# EAGLE board 4x1button_msp430 v10 (EAGLE 9.7.0)
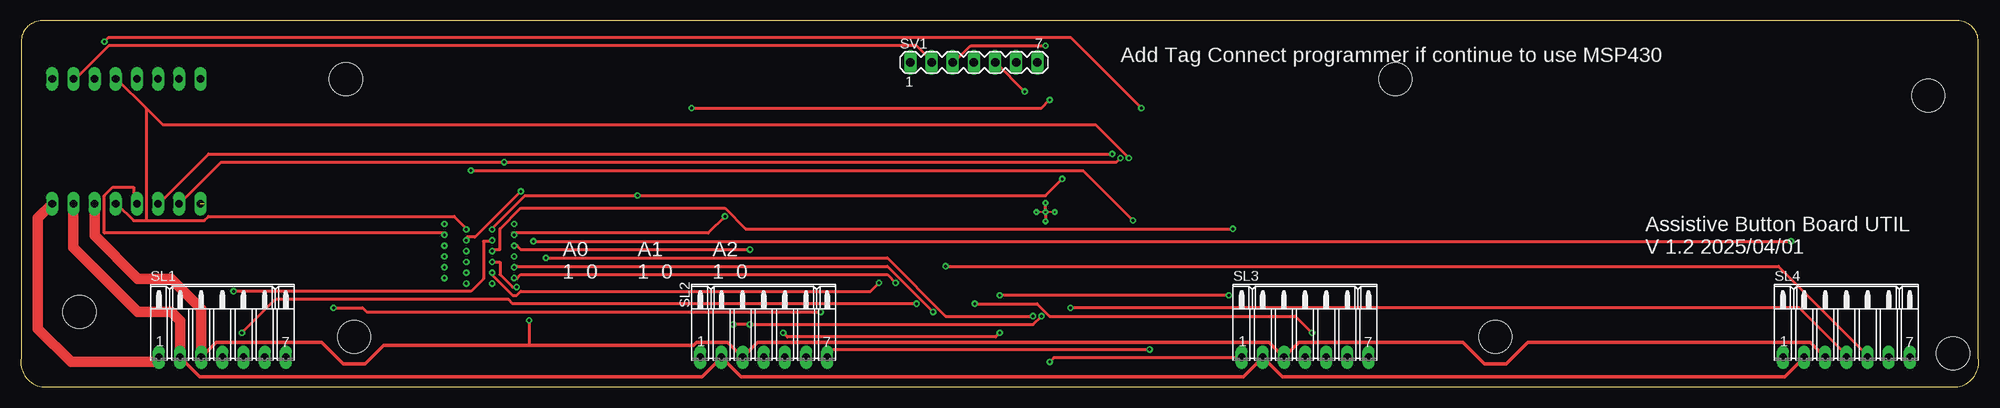
[diagram p0: board, top side]
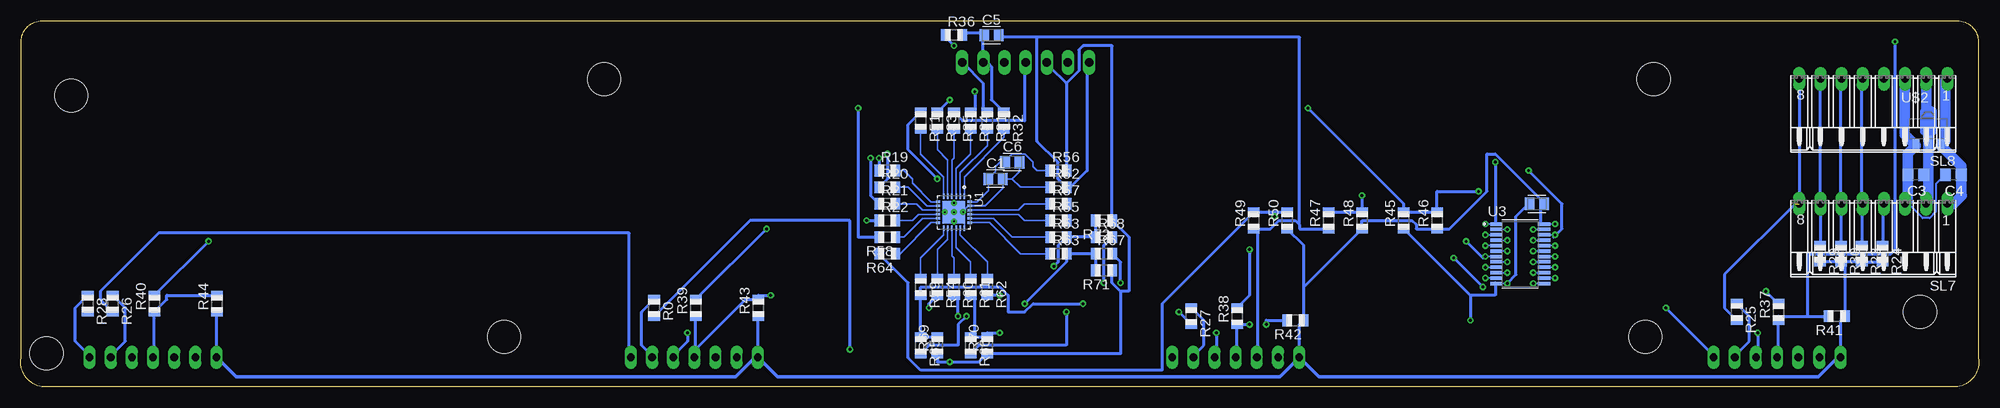
[diagram p1: board, bottom side, seen from below]

Size 235.08 x 44 mm. Coordinates in mm from the lower left corner, seen from the top.
Outline: 232.54,44 2.54,44 arc90 0.04,41.5 0.04,3.5 arc90 2.54,0 232.54,0 arc90 235.04,3.5 235.04,41.5 arc90 232.54,44
Copper layers (1*16): Top 0.035mm / dielectric 1.5mm / Bottom 0.035mm
Design rules "Fusion Electronics Design Rules": minimum track width 6mil, minimum drill 0.35mm, track to track 6mil, track to pad 6mil, pad to pad 6mil, via to via 6mil, smd to smd 6mil, copper to edge 40mil, drill to drill 6mil, minimum pad ring 10mil, minimum via ring 8mil, stop-mask expansion 4mil, vias tented up to drill 0mil, thermal gap 10mil
Holes 4 mm at 39.04,36.98 232,4.05 7.04,9 40.04,6 177.04,6 229.04,35 165.04,37

## Footprints (pad centres in the part's own frame; a part is rotated, then mirrored left to right if it is on the bottom)
CAPC2012X110 = smd 1.165 x 1.465: 1 -0.875,0; 2 0.875,0
C0805 = smd 1.3 x 1.5: 1 -0.95,0; 2 0.95,0
R0805 = smd 1.1 x 1.4: 1 -1,0; 2 1,0
07PA = drill 0.914 long: 1 -7.62,0; 2 -5.08,0; 3 -2.54,0; 4 0,0; 5 2.54,0; 6 5.08,0; 7 7.62,0
08PA = drill 0.914 long: 1 -8.89,0; 2 -6.35,0; 3 -3.81,0; 4 -1.27,0; 5 1.27,0; 6 3.81,0; 7 6.35,0; 8 8.89,0
MA07-1 = drill 1.016 long: 1 -7.62,0; 2 -5.08,0; 3 -2.54,0; 4 0,0; 5 2.54,0; 6 5.08,0; 7 7.62,0
QFN50P400X400X100-25N = smd 0.58 x 0.24: 1 -1.913,1.25; 2 -1.913,0.75; 3 -1.913,0.25; 4 -1.913,-0.25; 5 -1.913,-0.75; 6 -1.913,-1.25; 13 1.913,-1.25; 14 1.913,-0.75; 15 1.913,-0.25; 16 1.913,0.25; 17 1.913,0.75; 18 1.913,1.25 | smd 0.24 x 0.58: 7 -1.25,-1.913; 8 -0.75,-1.913; 9 -0.25,-1.913; 10 0.25,-1.913; 11 0.75,-1.913; 12 1.25,-1.913; 19 1.25,1.913; 20 0.75,1.913; 21 0.25,1.913; 22 -0.25,1.913; 23 -0.75,1.913; 24 -1.25,1.913 | smd 2.7 x 2.7: 25 0,0 | drill 0.2 pad 0.3: 26 0,1.1; 27 -1.1,0; 28 0,0; 29 1.1,0; 30 0,-1.1
SOP65P640X110-24N = smd 1.57 x 0.41: 1 -2.87,3.575; 2 -2.87,2.925; 3 -2.87,2.275; 4 -2.87,1.625; 5 -2.87,0.975; 6 -2.87,0.325; 7 -2.87,-0.325; 8 -2.87,-0.975; 9 -2.87,-1.625; 10 -2.87,-2.275; 11 -2.87,-2.925; 12 -2.87,-3.575; 13 2.87,-3.575; 14 2.87,-2.925; 15 2.87,-2.275; 16 2.87,-1.625; 17 2.87,-0.975; 18 2.87,-0.325; 19 2.87,0.325; 20 2.87,0.975; 21 2.87,1.625; 22 2.87,2.275; 23 2.87,2.925; 24 2.87,3.575
HT7750-1 = smd 0.8 x 1.4: GND -1.499,-1.981; VOUT 1.499,-1.981 | smd 0.8 x 1.9: VIN 0,-1.727

## Placement (x,y rotation side)
C1  0.1uf  [CAPC2012X110]  118.04,25 0 bottom
C2  0.1uf  [CAPC2012X110]  53.04,22 180 bottom
C3  0.1uf  [C0805]  7.54,25.5 180 bottom
C4  0.1uf  [C0805]  3.04,25.5 180 bottom
C5  1000pf  [CAPC2012X110]  118.54,42.25 0 bottom
C6  10uf  [CAPC2012X110]  116.04,27 0 bottom
R0  10  [R0805]  159.04,9.5 270 bottom
R19  10  [R0805]  131.04,26 0 bottom
R20  10  [R0805]  131.04,24 0 bottom
R21  10  [R0805]  131.04,22 0 bottom
R22  10  [R0805]  131.04,20 0 bottom
R23  2k  [R0805]  14.04,16 270 bottom
R24  2k  [R0805]  11.54,16 270 bottom
R25  0  [R0805]  29.04,9 270 bottom
R26  0  [R0805]  224.04,10 270 bottom
R27  0  [R0805]  94.54,8.5 270 bottom
R28  0  [R0805]  227.04,10 270 bottom
R29  2k  [R0805]  19.04,16 270 bottom
R30  2k  [R0805]  16.54,16 270 bottom
R31  10  [R0805]  119.04,32 270 bottom
R32  10  [R0805]  117.04,32 270 bottom
R33  DNP_10  [R0805]  125.04,32 270 bottom
R34  10  [R0805]  121.04,32 270 bottom
R35  10  [R0805]  123.04,32 270 bottom
R36  47k  [R0805]  123.04,42.28 0 bottom
R37  10  [R0805]  24.04,9 90 bottom
R38  10  [R0805]  89.04,8.5 90 bottom
R39  10  [R0805]  154.04,9.5 90 bottom
R40  10  [R0805]  219.04,10 90 bottom
R41  1k  [R0805]  17.04,8.5 180 bottom
R42  1k  [R0805]  82.04,8 180 bottom
R43  1k  [R0805]  146.54,9.5 90 bottom
R44  1k  [R0805]  211.54,10 90 bottom
R45  10  [R0805]  69.04,20 90 bottom
R46  DNP_10  [R0805]  65.04,20 90 bottom
R47  10  [R0805]  78.04,20 90 bottom
R48  DNP_10  [R0805]  74.04,20 90 bottom
R49  10  [R0805]  87.04,20 90 bottom
R50  DNP_10  [R0805]  83.04,20 90 bottom
R51  DNP_10  [R0805]  127.04,32 270 bottom
R52  10  [R0805]  110.47,24 0 bottom
R53  10  [R0805]  110.47,18 0 bottom
R54  10  [R0805]  125.04,12 270 bottom
R55  10  [R0805]  110.47,20 0 bottom
R56  10  [R0805]  110.47,26 0 bottom
R57  10  [R0805]  110.47,22 0 bottom
R58  10  [R0805]  131.04,18 180 bottom
R59  10  [R0805]  127.04,12 270 bottom
R60  10  [R0805]  123.04,12 270 bottom
R61  10  [R0805]  121.04,12 270 bottom
R62  10  [R0805]  119.04,12 270 bottom
R63  10  [R0805]  110.47,16 0 bottom
R64  DNP_10  [R0805]  131.04,16 180 bottom
R65  10  [R0805]  127.04,5 270 bottom
R66  10  [R0805]  121.04,5 270 bottom
R67  10  [R0805]  105.04,16 0 bottom
R68  10  [R0805]  105.04,18 0 bottom
R69  1k  [R0805]  125.04,5 90 bottom
R70  1k  [R0805]  119.04,5 90 bottom
R71  1k  [R0805]  105.04,14 180 bottom
R72  1k  [R0805]  105.04,20 180 bottom
SL1  [07PA]  24.2,3.56 0 top
SL2  [07PA]  89.2,3.56 0 top
SL3  [07PA]  154.2,3.56 0 top
SL4  [07PA]  219.2,3.56 0 top
SL7  [08PA]  12.66,22 180 bottom
SL8  [08PA]  12.66,37 180 bottom
SV1  MSP_Programmer  [MA07-1]  114.44,39 0 top
U1  MSP430FR2433IRGER  [QFN50P400X400X100-25N]  123.04,21 270 bottom
U3  PCA9555PW,118  [SOP65P640X110-24N]  55.04,16 0 bottom
U$2  HT7533-1  [HT7750-1]  6.04,31 0 bottom

## Library data of the parts
C1 C2 C5 C6 = Capacitor; CATEGORY: Capacitor; PACKAGE_SIZE: 0805; PACKAGE_TYPE: SMD; SUBCATEGORY: Ceramic Capacitors; TYPE: MLCC
C3 C4 = resistor; HEIGHT: 1
R0 R19-R72 = adafruit
SL1-SL4 SL7 SL8 = con-amp-quick; OC_FARNELL: unknown; OC_NEWARK: unknown
SV1 = con-lstb; OC_FARNELL: unknown; OC_NEWARK: unknown
U1 = MSP430FR2433IRGER; MANUFACTURER: Texas Instruments; MAXIMUM_PACKAGE_HEIGHT: 1.00 mm; PARTREV: 8/2017; STANDARD: Manufacturer Recommendations
U3 = PCA9555PW_118; MANUFACTURER: NXP; MAXIMUM_PACKAGE_HEIGHT: 1.1mm; PARTREV: 10; STANDARD: IPC 7351B
U$2 = SOT89_VoltageRgulator

## Nets
!BCL_RST: C5.1 R32.1 R36.2 SV1.6
!INT: R19.1 R29.1 SL7.7 SL8.7 U3.1
!RESET: R20.1 R30.1 SL7.6 SL8.6
!RST!/NMI/SBWTDIO: R32.2 U1.1
+3V3: C2.1 C4.1 R23.2 R24.2 R29.2 R30.2 R36.1 R41.1 R42.1 R43.1 R44.1 R46.1 R48.1 R50.1 R56.2 R69.1 R70.1 R71.1 R72.1 SL1.1 SL2.1 SL3.1 SL4.1 SL7.1 SL8.1 SV1.3 U3.24 U$2.VOUT
+5: C3.1 SL1.2 SL2.2 SL3.2 SL4.2 SL7.2 SL8.2 SV1.2 U$2.VIN
A0: R33.1 R45.2 R46.2 U3.21
A1: R47.2 R48.2 R51.1 U3.2
A2: R49.2 R50.2 R64.2 U3.3
BCL_RXD: R35.1 SV1.4
BCL_TXD: R34.1 SV1.5
BLC_TEST: R31.1 SV1.7
BUTTON1: R37.1 R41.2 R58.2 SL1.4
BUTTON2: R38.1 R42.2 R60.2 SL2.4
BUTTON3: R39.1 R43.2 R62.2 SL3.4
BUTTON4: R40.1 R44.2 R54.2 SL4.4
D_IN1: R25.1 SL1.6
D_IN2: R27.1 SL2.6
D_IN3: R0.1 SL3.6
D_IN4: R26.1 SL4.6
D_OUT1: R27.2 SL1.7
D_OUT2: R0.2 SL2.7
D_OUT3: R26.2 SL3.7
D_OUT4: R28.1 SL4.7
DVCC: C1.1 C6.1 R56.1 U1.24
DVSS: C1.2 C6.2 R52.1 U1.18 U1.23 U1.25 U1.26 U1.27 U1.28 U1.29 U1.30
FEEDBACK1: R59.2 R65.1 R69.2 SL1.5
FEEDBACK2: R61.2 R66.1 R70.2 SL2.5
FEEDBACK3: R63.2 R67.1 R71.2 SL3.5
FEEDBACK4: R53.2 R68.1 R72.2 SL4.5
GND: C2.2 C3.2 C4.2 C5.2 R45.1 R47.1 R49.1 R52.2 SL1.3 SL2.3 SL3.3 SL4.3 SL7.3 SL8.3 SV1.1 U3.12 U$2.GND
IO0_0: R37.2 U3.4
IO0_1: R38.2 U3.5
IO0_2: R39.2 U3.6
IO0_3: R40.2 U3.7
IO0_4: R65.2 U3.8
IO0_5: R66.2 U3.9
IO0_6: R67.2 U3.10
IO0_7: R68.2 U3.11
IO1_0: U3.13
IO1_1: U3.14
IO1_2: U3.15
IO1_3: U3.16
IO1_4: U3.17
IO1_5: U3.18
IO1_6: U3.19
IO1_7: U3.20
NEO_PIXEL_IN: R25.2 SL7.8 SL8.8
NEO_PIXEL_OUT: R28.2
P1.0/UCB0STE/TA0CLK/A0/VEREF+: R19.2 U1.7
P1.1/UCB0CLK/TA0.1/A1: R20.2 U1.8
P1.2/UCB0SIMO/UCB0SDA/TA0.2/A2/VEREF-: R21.2 U1.9
P1.3/UCB0SOMI/UCB0SCL/MCLK/A3: R22.2 U1.10
P1.4/UCA0TXD/UCA0SIMO/TA1.2/TCK/A4/VREF+: R34.2 U1.3
P1.5/UCA0RXD/UCA0SOMI/TA1.1/TMS/A5: R35.2 U1.4
P1.6/UCA0CLK/TA1CLK/TDI/TCLK/A6: R33.2 U1.5
P1.7/UCA0STE/SMCLK/TDO/A7: R51.2 U1.6
P2.0/XOUT: R55.1 U1.21
P2.1/XIN: R57.1 U1.22
P2.2/ACLK: R58.1 U1.11
P2.3: R59.1 U1.13
P2.4/UCA1CLK: R60.1 U1.15
P2.5/UCA1RXD/UCA1SOMI: R61.1 U1.16
P2.6/UCA1TXD/UCA1SIMO: R62.1 U1.17
P2.7: R63.1 U1.19
P3.0: R64.1 U1.12
P3.1/UCA1STE: R54.1 U1.14
P3.2: R53.1 U1.20
SCL: R22.1 R23.1 SL7.5 SL8.5 U3.22
SDA: R21.1 R24.1 SL7.4 SL8.4 U3.23
TEST/SBWTCK: R31.2 U1.2

## Tracks (layer width: path | path; a pad name or v marks a point on that pad's centre or on a via)
!BCL_RST
  Bottom 0.35: R36.2 122.04,42.5 119.54,42.5 C5.1 119.54,42 119.54,39 SV1.6 119.04,39 118.54,38.5 118.54,34.5 R32.1
!INT  (via drill 0.35)
  Top 0.35: v132.04,27.5 131.54,27 v58.04,27 24.04,27 19.04,22 SL7.7
  Bottom 0.203: U3.1 v59.23,19.58
  Bottom 0.35: 19.04,22 R29.1 | v132.04,27.5 R19.1 | v58.04,27 58.04,19.5 U3.1 | 19.04,22 19.04,37 SL8.7 | 19.04,22 SL7.7
!RESET  (via drill 0.35)
  Top 0.35: v131.04,28 22.54,28 16.54,22 SL7.6
  Bottom 0.35: 16.54,22 R30.1 | R20.1 131.04,25 v131.04,28 | 16.54,22 16.54,37 SL8.6 | 16.54,22 SL7.6
!RST!/NMI/SBWTDIO
  Bottom 0.203: U1.1 121.79,25.25 117.04,30 R32.2
+3V3  (via drill 0.35)
  Top 0.35: v123.04,41 114.04,41 112.04,39 SV1.3 | v123.54,3 124.04,3.5 146.54,3.5 SL3.1
  Top 1.27: SL7.1 2.04,20.27 2.04,7 6.04,3 16.02,3 SL1.1
  Bottom 0.203: U3.24 v50.85,19.58
  Bottom 0.35: 109.54,36.5 109.54,26 R56.2 | 109.54,36.5 111.54,38.5 111.54,39 SV1.3 | v123.04,41 124.04,42 R36.1 | R69.1 125.04,3 v123.54,3 120.04,3 R70.1 103.04,4 103.04,11.5 | R71.1 104.04,12.5 103.04,11.5 | 103.04,11.5 102.04,11.5 102.04,18 R72.1 104.04,41 107.54,41 108.04,40.5 108.04,38 109.54,36.5 | 52.54,22 52.54,19.5 U3.24 | 52.54,22 52.54,22.5 58.04,28 59.04,28 59.04,23.5 63.54,19 R46.1 67.54,19 67.54,19.5 68.04,20 74.04,20 R48.1 81.04,12 | 52.54,22 C2.1 | R24.2 R23.2 16.04,15 | R29.2 R30.2 16.04,15 | SL1.1 16.54,4 16.54,8 R41.1 16.04,15 | SL2.1 81.54,4 81.54,7.5 R42.1 81.04,12 | R43.1 146.54,4 SL3.1 | R44.1 211.54,4 SL4.1 | R50.1 81.04,17 81.04,12
  Bottom 0.406: SL1.1 16.9,3.56 19.25,1.22 79.24,1.22 SL2.1 83.93,1.22 144.24,1.22 SL3.1 146.9,3.56 149.25,1.22 209.24,1.22 SL4.1
  Bottom 1.27: SL8.1 4.04,36.73 4.04,29.52 U$2.VOUT 2.09,26.57 C4.1 2.09,23.05 2.04,23 3.04,22 SL7.1
+5
  Top 0.35: SL8.2 6.54,37 10.54,41 107.54,41 109.54,39 SV1.2
  Top 0.406: SL4.2 211.78,1.22 151.47,1.22 SL3.2 146.78,1.22 86.47,1.22 SL2.2 81.78,1.22 21.47,1.22 SL1.2
  Top 1.27: SL7.2 6.31,16.73 14.04,9 18.04,9 19.12,7.92 SL1.2
  Bottom 1.27: SL8.2 6.31,33.27 6.04,33 6.04,29.5 U$2.VIN 6.04,26.05 | 6.04,26.05 6.04,25 | 6.04,25 6.04,22.27 SL7.2 | 6.04,25 6.09,25 C3.1 6.04,26.05
A0  (via drill 0.35)
  Top 0.35: v123.54,34.5 122.54,33.5 v80.54,33.5 | v60.04,23.5 54.54,18 53.54,18 v53.49,17.62
  Bottom 0.203: U3.21 v53.49,17.62
  Bottom 0.35: v123.54,34.5 R33.1 | v80.54,33.5 69.04,22 R45.2 R46.2 65.04,23.5 v60.04,23.5
A1  (via drill 0.35)
  Top 0.35: v125.04,25 123.04,23 v74.04,23 60.54,23 56.54,19 v56.59,18.92
  Bottom 0.203: U3.2 v56.59,18.92
  Bottom 0.35: R47.2 R48.2 v74.04,23 | R51.1 128.54,31.5 128.54,28.5 v125.04,25
A2  (via drill 0.35)
  Top 0.35: v84.54,20.5 82.54,18.5 59.04,18.5 v59.23,18.28
  Bottom 0.203: U3.3 v59.23,18.28
  Bottom 0.35: 84.54,21 R49.2 98.04,10 98.04,2 127.04,2 128.54,3.5 128.54,12.5 R64.2 | 84.54,21 R50.2 | 84.54,21 v84.54,20.5
BCL_RXD
  Bottom 0.35: R35.1 122.04,32 114.54,32 114.54,39 SV1.4
BCL_TXD  (via drill 0.35)
  Top 0.35: v120.54,35.5 117.04,39 SV1.5
  Bottom 0.35: R34.1 120.54,33.5 v120.54,35.5
BLC_TEST
  Bottom 0.35: R31.1 119.54,33.5 119.54,36.5 122.04,39 SV1.7
BUTTON1  (via drill 0.35)
  Top 0.35: v134.54,33.5 126.04,42 10.54,42 v10.04,41.5
  Bottom 0.35: SL1.4 24.04,4 R37.1 24.04,8.5 20.54,8.5 | 20.54,8.5 R41.2 | R58.2 134.54,18 v134.54,33.5 | v10.04,41.5 10.04,16.5 10.54,16 20.54,16 20.54,8.5
BUTTON2  (via drill 0.35)
  Top 0.35: v85.54,7.5 v87.54,7.5 121.54,7.5 v122.54,8.5
  Bottom 0.35: SL2.4 89.04,4 R38.1 v87.54,7.5 | R42.2 85.54,8 v85.54,7.5 | R60.2 122.54,10.5 v122.54,8.5
BUTTON3  (via drill 0.35)
  Top 0.35: v145.04,11 v117.54,11
  Bottom 0.35: 154.04,4.5 154.04,4 SL3.4 154.04,4.5 | 154.04,4.5 R39.1 | 154.04,4.5 148.04,10.5 R43.2 146.54,11 v145.04,11 | v117.54,11 R62.2
BUTTON4  (via drill 0.35)
  Top 0.35: v126.04,9.5 213.54,9.5 219.04,4 SL4.4
  Bottom 0.35: R54.2 126.04,10 v126.04,9.5 | SL4.4 219.04,4 R40.1 217.54,10.5 217.54,11 R44.2
D_IN1
  Bottom 0.35: R25.1 27.54,8.5 27.54,5.5 29.04,4 SL1.6
D_IN2
  Bottom 0.35: R27.1 93.04,8 93.04,5 94.04,4 SL2.6
D_IN3
  Bottom 0.35: R0.1 160.54,9 160.54,5 159.54,4 SL3.6
D_IN4
  Bottom 0.35: R26.1 222.54,9.5 222.54,5.5 224.04,4 SL4.6
D_OUT1  (via drill 0.35)
  Top 0.35: v96.04,9 41.54,9 41.04,9.5 v37.54,9.5
  Bottom 0.35: v96.04,9 R27.2 | v37.54,9.5 32.04,4 SL1.7
D_OUT2  (via drill 0.35)
  Top 0.35: v135.54,4.5 97.54,4.5 97.04,4 SL2.7
  Bottom 0.35: R0.2 147.54,20 135.54,20 v135.54,4.5
D_OUT3
  Bottom 0.35: R26.2 225.54,10.5 225.54,11.5 218.54,18.5 162.04,18.5 162.04,4 SL3.7
D_OUT4
  Bottom 0.35: R28.1 228.54,9.5 228.54,5.5 227.04,4 SL4.7
DVCC
  Bottom 0.203: U1.24 120.29,22.25 118.92,23.62 C1.1 118.04,25.88 118.04,26.5 117.54,27 C6.1 116.92,27.12 116.04,28 114.49,28 113.54,27.05 113.54,26.5 113.04,26 R56.1
DVSS
  Top 0.203: U1.26 U1.30
  Top 0.35: U1.29 U1.28 U1.27
  Bottom 0.203: C6.2 115.17,25.88 116.04,25 | 116.04,25 C1.2 117.17,23.88 119.29,21.75 | R52.1 115.04,24 116.04,25 | U1.18 121.79,19.75 122.04,20 122.94,20 U1.29 U1.28 U1.30 | U1.26 121.67,21.27 121.67,21.46 121.38,21.75 U1.23
  Bottom 0.254: 119.29,21.75 U1.23
FEEDBACK1  (via drill 0.35)
  Top 0.35: v26.54,6.5 30.54,10.5 58.54,10.5 59.04,10 v107.54,10
  Bottom 0.35: R69.2 R65.1 R59.2 127.04,12 117.54,12 116.54,11 116.54,9 114.54,9 113.54,10 v107.54,10 | v26.54,6.5 26.54,4 SL1.5
FEEDBACK2  (via drill 0.35)
  Top 0.35: v91.54,6.5 92.04,6 117.04,6 v117.54,6.5
  Bottom 0.35: 120.54,6 R70.2 119.04,6.5 v117.54,6.5 | R61.2 120.54,10.5 120.54,6 | 120.54,6 R66.1 | v91.54,6.5 91.54,4 SL2.5
FEEDBACK3  (via drill 0.35)
  Top 0.35: v155.04,6.5 153.04,8.5 123.54,8.5 122.04,10 v114.54,10
  Bottom 0.35: R71.2 R67.1 R63.2 109.54,16 109.54,15 v114.54,10 | v155.04,6.5 155.04,5.5 156.54,4 SL3.5
FEEDBACK4  (via drill 0.35)
  Top 0.35: v111.04,14.5 211.04,14.5 221.54,4 SL4.5
  Bottom 0.35: R72.2 R68.1 R53.2 109.54,18 110.54,17 110.54,15 v111.04,14.5
GND  (via drill 0.35)
  Top 0.35: v61.04,8 61.04,5
  Top 0.406: SL1.3 23.44,5.34 36.15,5.34 38.71,2.78 41.37,2.78 43.59,5 61.04,5 80.8,5 81.14,5.34 84.89,5.34 SL2.3 88.44,5.34 149.89,5.34 SL3.3 153.44,5.34 173.15,5.34 175.71,2.78 178.37,2.78 180.93,5.34 214.89,5.34 SL4.3
  Top 1.27: SL1.3 21.66,9.38 18.04,13 14.04,13 8.85,18.19 SL7.3
  Bottom 0.203: U3.12 v56.59,12.42
  Bottom 0.254: C4.2 5.13,24.36 5.13,21.07 5.9,20.3 6.72,20.3 8.42,22 SL7.3
  Bottom 0.35: SV1.1 107.04,39 107.04,26 109.04,24 R52.2 109.54,24 110.54,25 110.54,27 113.04,29.5 113.04,42 | 113.04,42 117.54,42 C5.2 | R47.1 81.54,19 81.54,19.5 | 81.54,19.5 82.04,20 84.04,20 85.04,19 86.54,19 | 86.54,19 86.54,4 SL2.3 | 86.54,19 R49.1 | 61.04,11 R45.1 | 61.04,11 58.04,11 58.04,12.5 U3.12 | C2.2 54.04,22 55.54,20.5 55.54,13.5 56.54,12.5 v56.59,12.42 | 61.04,11 v61.04,8 | 113.04,42 81.54,42 81.54,19.5
  Bottom 1.27: SL8.3 8.85,30.33 U$2.GND 8.49,28.07 C3.2 8.49,22.36 SL7.3
IO0_0  (via drill 0.35)
  Top 0.35: v25.54,11.5 54.04,11.5 55.54,13 55.54,17.5 56.54,17.5 v56.59,17.62
  Bottom 0.203: U3.4 v56.59,17.62
  Bottom 0.35: v25.54,11.5 R37.2
IO0_1  (via drill 0.35)
  Top 0.35: v87.54,16.5 60.04,16.5 59.54,17 v59.23,16.97
  Bottom 0.203: U3.5 v59.23,16.97
  Bottom 0.35: R38.2 87.54,11 v87.54,16.5
IO0_2  (via drill 0.35)
  Top 0.35: v145.54,19 87.04,19 84.54,21.5 60.04,21.5 57.54,19 57.54,16.5 56.54,16.5 v56.59,16.33
  Bottom 0.203: U3.6 v56.59,16.33
  Bottom 0.35: v145.54,19 R39.2
IO0_3  (via drill 0.35)
  Top 0.35: v61.54,17.5 v212.54,17.5
  Bottom 0.203: U3.7 v59.23,15.67
  Bottom 0.35: v212.54,17.5 R40.2 | v61.54,17.5 59.54,15.5 v59.23,15.67
IO0_4  (via drill 0.35)
  Top 0.35: v121.54,8.5 111.04,8.5 104.04,15.5 v63.04,15.5 | v59.54,12 59.04,12 57.54,13.5 57.54,15 56.54,15 v56.59,15.03
  Bottom 0.203: U3.8 v56.59,15.03
  Bottom 0.35: R65.2 126.04,5 122.54,5 122.54,7.5 v121.54,8.5 | v59.54,12 v63.04,15.5
IO0_5  (via drill 0.35)
  Top 0.35: v109.54,9 104.04,14.5 59.54,14.5 v59.23,14.38
  Bottom 0.203: U3.9 v59.23,14.38
  Bottom 0.35: R66.2 120.04,5 109.54,5 v109.54,9
IO0_6  (via drill 0.35)
  Top 0.35: v103.04,12.5 102.04,11.5 60.04,11.5 59.54,11 59.04,11 56.54,13.5 v56.59,13.72
  Bottom 0.203: U3.10 v56.59,13.72
  Bottom 0.35: R67.2 103.04,15 v103.04,12.5
IO0_7  (via drill 0.35)
  Top 0.35: v105.04,12.5 104.04,13.5 60.04,13.5 59.54,13 v59.23,13.08
  Bottom 0.203: U3.11 v59.23,13.08
  Bottom 0.35: R68.2 105.04,17 v105.04,12.5
IO1_0  (via drill 0.35)
  Bottom 0.203: U3.13 v53.49,12.42
IO1_1  (via drill 0.35)
  Bottom 0.203: U3.14 v50.85,13.08
IO1_2  (via drill 0.35)
  Bottom 0.203: U3.15 v53.49,13.72
IO1_3  (via drill 0.35)
  Bottom 0.203: U3.16 v50.85,14.38
IO1_4  (via drill 0.35)
  Bottom 0.203: U3.17 v53.49,15.03
IO1_5  (via drill 0.35)
  Bottom 0.203: U3.18 v50.85,15.67
IO1_6  (via drill 0.35)
  Bottom 0.203: U3.19 v53.49,16.33
IO1_7  (via drill 0.35)
  Bottom 0.203: U3.20 v50.85,16.97
NEO_PIXEL_IN  (1 unrouted)
  Bottom 0.35: R25.2 30.54,9.5 30.54,13.5 22.04,22 | SL8.8 SL7.8
P1.0/UCB0STE/TA0CLK/A0/VEREF+
  Bottom 0.203: U1.7 125.79,22.25 128.04,24.5 128.04,25 129.04,26 R19.2
P1.1/UCB0CLK/TA0.1/A1
  Bottom 0.203: U1.8 126.29,21.75 128.54,24 R20.2
P1.2/UCB0SIMO/UCB0SDA/TA0.2/A2/VEREF-
  Bottom 0.203: U1.9 126.79,21.25 127.54,22 R21.2
P1.3/UCB0SOMI/UCB0SCL/MCLK/A3
  Bottom 0.203: U1.10 127.29,20.75 128.04,20 R22.2
P1.4/UCA0TXD/UCA0SIMO/TA1.2/TCK/A4/VREF+
  Bottom 0.203: U1.3 122.79,26.25 121.04,28 R34.2
P1.5/UCA0RXD/UCA0SOMI/TA1.1/TMS/A5
  Bottom 0.203: U1.4 123.29,27.25 123.04,27.5 R35.2
P1.6/UCA0CLK/TA1CLK/TDI/TCLK/A6
  Bottom 0.203: U1.5 123.79,27.25 125.04,28.5 R33.2
P1.7/UCA0STE/SMCLK/TDO/A7
  Bottom 0.203: U1.6 124.29,25.25 127.04,28 R51.2
P2.0/XOUT
  Bottom 0.203: U1.21 115.29,20.75 114.54,20 R55.1
P2.1/XIN
  Bottom 0.203: U1.22 115.29,21.25 114.54,22 R57.1
P2.2/ACLK
  Bottom 0.203: U1.11 126.79,20.25 129.04,18 R58.1
P2.3
  Bottom 0.203: U1.13 124.29,18.25 127.04,15.5 R59.1
P2.4/UCA1CLK
  Bottom 0.203: U1.15 123.29,15.75 123.04,15.5 R60.1
P2.5/UCA1RXD/UCA1SOMI
  Bottom 0.203: U1.16 122.79,16.75 121.04,15 R61.1
P2.6/UCA1TXD/UCA1SIMO
  Bottom 0.203: U1.17 122.29,18.25 119.04,15 R62.1
P2.7
  Bottom 0.203: U1.19 118.79,19.75 115.04,16 R63.1
P3.0
  Bottom 0.203: U1.12 125.79,19.75 129.54,16 R64.1
P3.1/UCA1STE
  Bottom 0.203: U1.14 123.79,17.75 125.04,16.5 R54.1
P3.2
  Bottom 0.203: U1.20 118.29,20.25 116.04,18 R53.1
SCL  (via drill 0.35)
  Top 0.35: v133.54,20 127.54,26 v54.04,26 | SL7.5 13.54,22 13.54,24 11.04,24 10.04,23 10.04,18.5 51.04,18.5 v50.85,18.28
  Bottom 0.203: U3.22 v50.85,18.28
  Bottom 0.35: 14.04,22 R23.1 | 14.04,22 14.04,37 SL8.5 | 14.04,22 SL7.5 | v133.54,20 R22.1 | v54.04,26 50.04,22 50.04,19 51.04,18 v50.85,18.28
SDA  (via drill 0.35)
  Top 0.35: 15.04,20 13.54,20 11.54,22 SL7.4 | 15.04,20 22.04,20 22.54,20.5 52.04,20.5 53.54,19 v53.49,18.92 | v133.04,27.5 129.04,31.5 17.04,31.5 15.04,33.5 | 15.04,33.5 11.54,37 SL8.4 | 15.04,33.5 15.04,20
  Bottom 0.203: U3.23 v53.49,18.92
  Bottom 0.35: R24.1 11.54,22 SL7.4 | R21.1 133.04,23 v133.04,27.5
TEST/SBWTCK
  Bottom 0.203: U1.2 122.29,25.75 119.04,29 R31.2

## Text on the board
tPlace: Assistive Button Board UTIL / V 1.2 2025/04/01 | A0 / 1 0 | A1 / 1 0 | A2 / 1 0
tNames: Add Tag Connect programmer if continue to use MSP430